# Altium PCB ip-mic.PcbDoc
Units mm, origin at the board's own origin, x right, y up, seen from the top; angles counter-clockwise.
Board outline 152.4 x 101.6 mm, 2 copper layers (Top Layer, Bottom Layer); 75 components, 61 nets, 288 pads, 100 vias.
Unrouted connection lines stored in the file: 46.
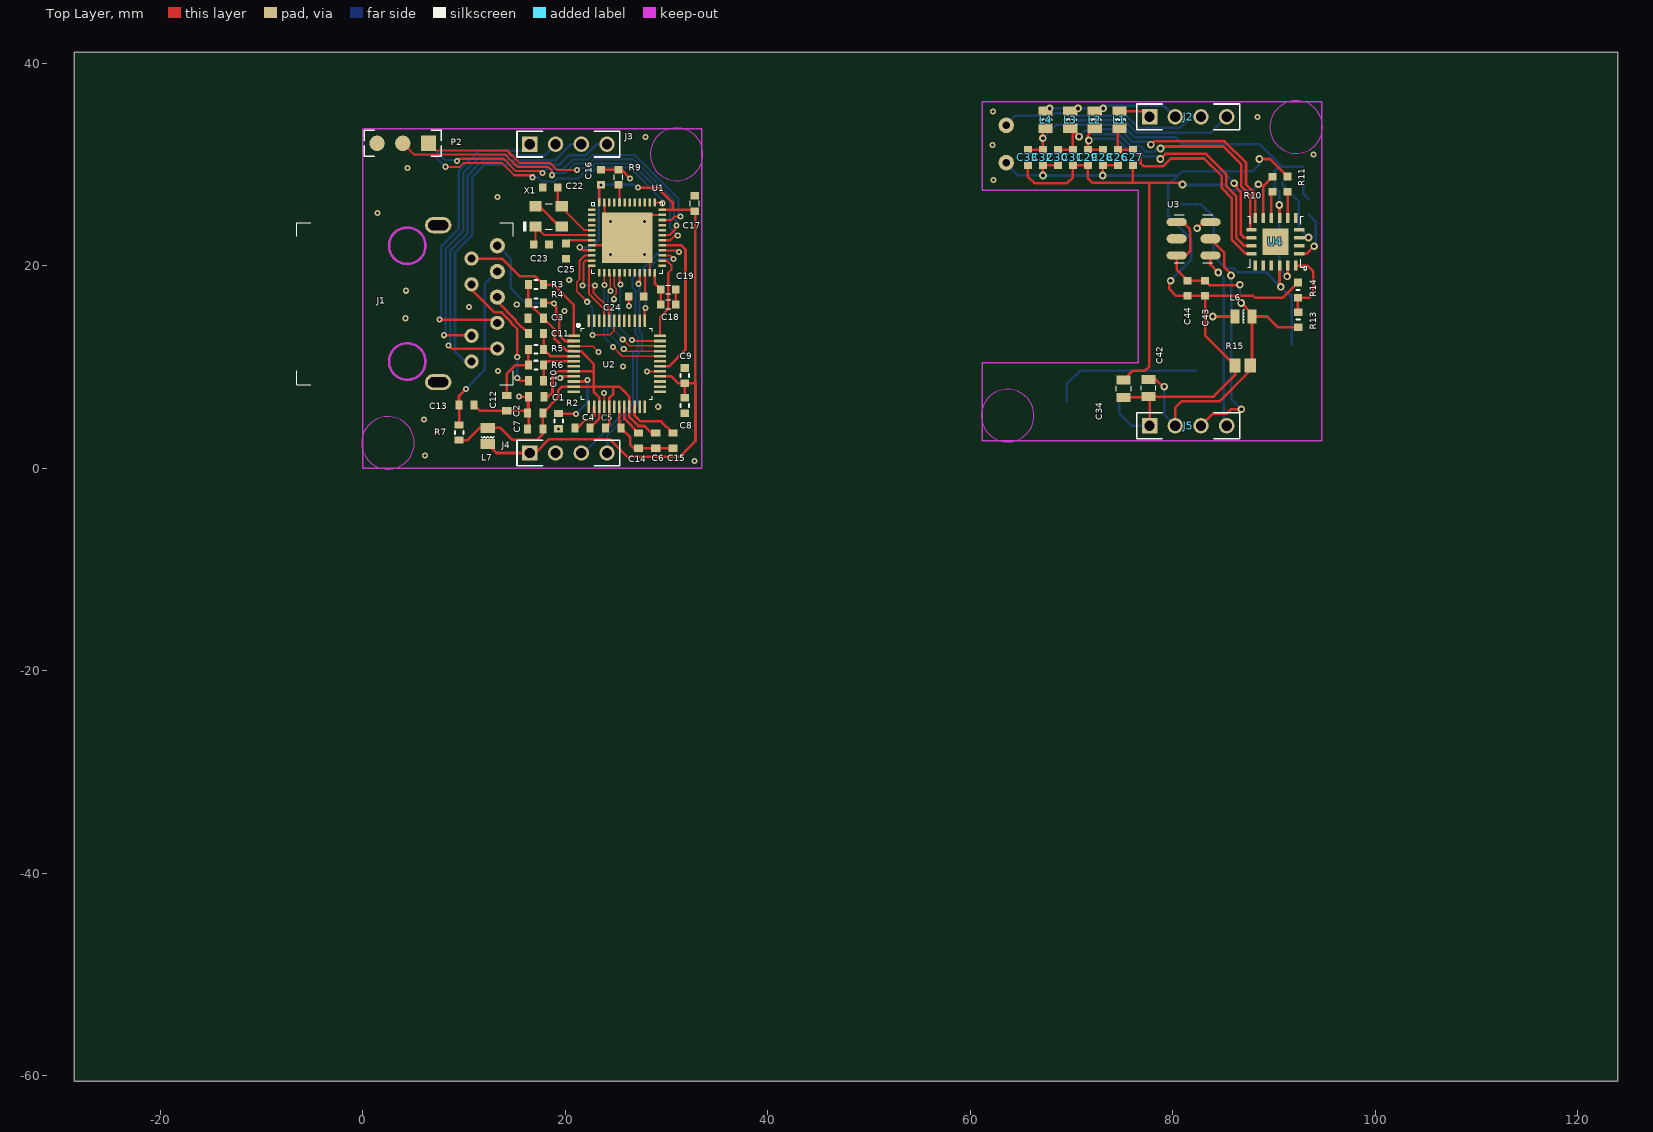
[diagram p0: Top Layer view]
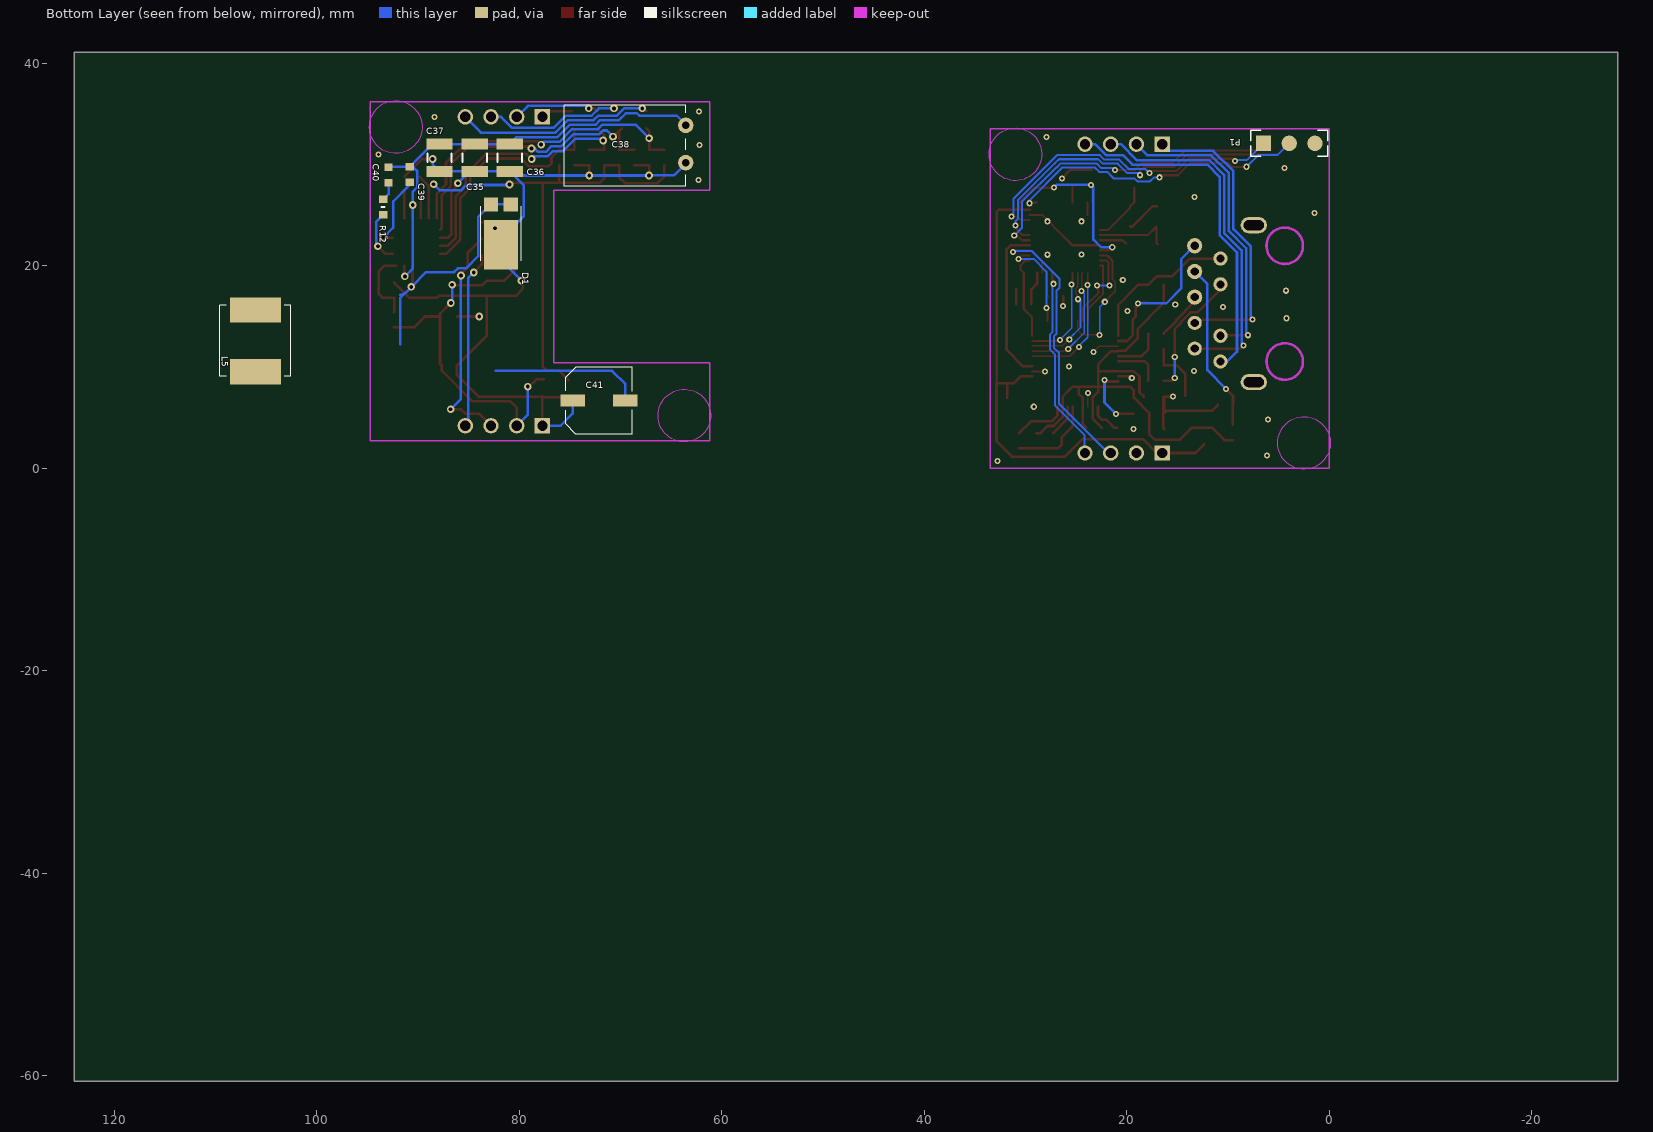
[diagram p1: Bottom Layer view, seen from below]

## Layer stack, top to bottom
Top Layer: signal copper 0.0356
Dielectric: dielectric 0.32, FR-4, Dk 4.8
Bottom Layer: signal copper 0.0356

## Board outline
-28.473,-60.531 123.927,-60.531 123.927,41.069 -28.473,41.069

## Design rules (kind name [scope] priority, off if disabled: settings)
Clearance [All] p1: gap=0.203
MinimumSolderMaskSliver [All] p1 off: minsoldermaskwidth=0.1
PolygonConnect [All] p1: connectstyle=Relief reliefconductorwidth=0.254 reliefentries=4 polygonreliefangle="90 Angle"
RoutingVias [All] p1: holewidth=0.3 width=0.6 viastyle="Through Hole" minholewidth=0.3 minwidth=0.6 maxholewidth=0.3 maxwidth=0.6
SilkscreenOverComponentPads [All] p1: minsilkscreentomaskgap=0.05
SolderMaskExpansion [All] p1: expansion=0.102
Width [All] p1: maxlimit=0.254 minlimit=0.152 preferedwidth=0.203
26 further rules are at their usual default settings.

## Components (designator, comment, footprint, x,y, rotation, side; value= is the part's Value field where it differs from the comment)
C1 "" 0603_C 17.145,7.061 r90 top
C2 "" 0603_C 17.043,5.461 r90 top
C3 "" 0603_C 17.094,14.808 r90 top
C4 "" 0603_C 21.717,3.988 r90 top
C5 "" 0603_C 24.74,3.988 r270 top
C6 "" 0603_C 28.943,2.718 r180 top
C7 "" 0603_C 17.043,3.861 r90 top
C8 "" C0603 31.801,6.198 r180 top
C9 "" C0603 31.801,9.144 r0 top
C10 "" 0603_C 17.12,8.636 r90 top
C11 "" 0603_C 17.12,13.284 r90 top
C12 "" 0603_C 14.224,6.426 r0 top
C13 "" 0603_C 10.262,6.248 r270 top
C14 "" 0603_C 27.254,2.718 r0 top
C15 "" 0603_C 30.632,2.718 r0 top
C16 "" C0603 23.52,28.727 r0 top
C17 "" C0603 32.791,26.137 r0 top
C18 "" C0603 30.175,16.18 r270 top
C19 "" C0603 30.175,17.653 r270 top
C22 "" C0603 18.517,27.737 r90 top
C23 "" C0603 17.653,22.073 r270 top
C24 "" C0603 27.026,16.967 r90 top
C25 "" C0603 20.091,21.438 r180 top
C26 "" C0603 74.567,30.683 r0 top
C27 "" C0603 76.048,30.683 r180 top
C28 "" C0603 73.087,30.683 r0 top
C29 "" C0603 71.606,30.683 r180 top
C30 "" C0603 68.645,30.683 r0 top
C31 "" C0603 70.126,30.683 r180 top
C32 "" C0603 67.165,30.683 r0 top
C33 "" C0603 65.684,30.683 r180 top
C34 "" C0805#1 75.133,7.849 r0 top
C35 "" C1210 84.379,30.655 r270 bottom
C36 "" C1210 80.924,30.655 r270 bottom
C37 "" C1210 87.859,30.655 r270 bottom
C38 "" CAP1 63.551,27.864 r0 bottom
C39 "" C0603 90.805,29.004 r0 bottom
C40 "" C0603 92.888,28.953 r0 bottom
C41 "" CAP2 72.111,6.678 r90 bottom
C42 "" C0805#1 77.597,7.925 r0 top
C43 "" C0603 83.185,17.777 r0 top
C44 "" C0603 81.458,17.777 r0 top
D1 "PDS5100" PDS5100 81.813,22.07 r0 bottom
J1 "HR891156C" HR891156C 6.4,16.25 r90 top locked
J2 "" CON4 85.319,34.692 r0 top
J3 "" CON4 24.13,32 r0 top locked
J4 "" CON4 24.13,1.5 r0 top locked
J5 "" CON4 85.319,4.192 r0 top
L1 "" L0805#1 74.727,34.414 r0 top
L2 "" L0805#1 72.297,34.414 r0 top
L3 "" L0805#1 69.867,34.414 r0 top
L4 "" L0805#1 67.437,34.414 r0 top
L5 "" IND7x7 102.54,16.078 r270 bottom
L6 "FB1" L0805#1 86.97,14.983 r90 top
L7 "HH-1M1608-121JT" L0805#2 12.344,3.175 r180 top
P1 "" CON3-SMT 6.502,32.08 r180 bottom
P2 "" CON3-SMT 6.502,32.08 r180 top
R2 "" 0603_R 19.355,4.648 r180 top
R3 "" 0603_R 17.12,18.136 r270 top
R4 "" 0603_R 17.12,16.332 r270 top
R5 "" 0603_R 17.12,11.735 r90 top
R6 "" 0603_R 17.12,10.185 r90 top
R7 "" 0603_R 9.525,3.531 r0 top
R9 "" C0603 25.273,28.727 r0 top
R10 "" R0603 89.84,27.28 r180 top
R11 "" R0603 91.313,27.305 r180 top
R12 "" R0603 93.421,25.042 r0 bottom
R13 "" R0603 92.38,15.418 r0 top
R14 "" R0603 92.354,18.339 r0 top
R15 "" C0805#2 86.893,10.157 r0 top
U1 "STM32F401CxU" UFQFPN48-7X7 26.111,22.758 r0 top
U2 "W5500" LQFP48-7x7 25.095,10.312 r0 top locked
U3 "MP45DT02-M" MP45DT02-M-1 80.162,25.016 r0 top
U4 "SI3402B" SI3402B 92.634,19.86 r180 top
X1 "25M" XTAL3225 18.364,24.867 r0 top

## Footprints (in the part's own frame and the unit in brackets; to place one, negate y for a bottom-side part, rotate by r counter-clockwise, add the part's x,y. Pads: shape width x height; smd on the part's side, far side on the other; paste and mask are expansions set on the pad)
0603_C [mm] "Microbit"
  rect 0.9x0.7 smd: 1(0,0.75) 2(0,-0.75)
  body extent -0.42,-0.75 0.43,0.8, height 0.45
0603_R [mm] "Microbit"
  rect 0.9x0.7 smd: 1(0,0.75) 2(0,-0.75)
  silkscreen extent -0.43,-0.15 0.43,0.15, body extent -0.42,-0.75 0.43,0.8, height 0.45
C0603 [mm] "0.8(无超出)  2."
  rect 0.8x0.75 smd: 1(0,0.75) 2(0,-0.75)
  silkscreen extent -0.43,-0.15 0.43,0.15
C0805#1 [mm] "2.0x1.2   两"
  rect 1.4x0.9 smd: 1(0,0.85) 2(0,-0.85)
  silkscreen extent -0.74,-0.23 0.74,0.23
C0805#2 [mm] "Chip Capacitor, Body 2.0x1.3mm, IPC High Density"
  rect 1.1x1.4 smd: 1(-0.75,0) 2(0.75,0)
  body extent -1.1,-0.72 1.1,0.72, height 1.4
C1210 [mm] "Chip Capacitor, Body 3.2x2.5mm, IPC High Density"
  rect 1.1x2.6 smd: 1(-1.35,0) 2(1.35,0)
  silkscreen extent -0.4,-1.2 0.4,1.2, body extent -1.7,-1.35 1.7,1.35, height 1.3
CAP1 [mil] "电"
  round 60 hole 30: 1(0,-91) 2(0,-236)
  silkscreen extent 0,-315 472,0
CAP2 [mm] "表"
  rect 1.2x2.4 smd: 1(0,2.6) 2(0,-2.6)
  silkscreen extent -3.3,-3.3 3.3,3.3
CON3-SMT [mil]
  rect 60x60 smd: 1(0,0)
  round 60 smd: 2(100,0) 3(200,0)
  silkscreen extent -50,-50 250,50
CON4 [mil] "2.54mm"
  rect 60x60 hole 40: 1(-300,0)
  round 60 hole 40: 2(-200,0) 3(-100,0) 4(0,0)
  silkscreen extent -350,-50 50,50
HR891156C [mm] "with POE 资"
  round 1.5 hole 0.8: 1(5.72,-6.895) 3(3.18,-6.895) 5(0.64,-6.895)
  round 1.4 hole 0.8: 2(4.45,-4.355) 4(1.91,-4.355) 7(-1.9,-6.895) 8(-3.17,-4.355) 9(-4.44,-6.895) 10(-5.71,-4.355)
  oval 1.6x2.6 hole 1 slot 2 at 90 deg: 11(-7.745,-1.057) 12(7.745,-1.057)
  Keep-Out Layer circle w0.254: c-5.715,1.995 r1.8
  Keep-Out Layer circle w0.254: c5.715,1.995 r1.8
  silkscreen extent -8,-8.48 8,12.92
IND7x7 [mm]
  rect 2.5x5 smd: 1(0.45,-3.5) 2(6.55,-3.5)
  silkscreen extent 0,-7 7,0
L0805#1 [mm] "2.0x1.2   两"
  rect 1.4x0.9 smd: 1(0,0.85) 2(0,-0.85)
  silkscreen extent -0.64,-0.08 0.64,0.08
L0805#2 [mm] "2.0x1.2   两"
  rect 1.4x1 smd: 1(0,0.8) 2(0,-0.8)
  silkscreen extent -0.64,0 0.64,0.16
LQFP48-7x7 [mm] "从mcu"
  rect 1.2x0.25 smd: 1(-4.25,2.75) 2(-4.25,2.25) 3(-4.25,1.75) 4(-4.25,1.25) 5(-4.25,0.75) 6(-4.25,0.25) 7(-4.25,-0.25) 8(-4.25,-0.75) 9(-4.25,-1.25) 10(-4.25,-1.75) 11(-4.25,-2.25) 12(-4.25,-2.75) 25(4.25,-2.75) 26(4.25,-2.25) 27(4.25,-1.75) 28(4.25,-1.25) 29(4.25,-0.75) 30(4.25,-0.25) 31(4.25,0.25) 32(4.25,0.75) 33(4.25,1.25) 34(4.25,1.75) 35(4.25,2.25) 36(4.25,2.75)
  rect 0.25x1.2 smd: 13(-2.75,-4.25) 14(-2.25,-4.25) 15(-1.75,-4.25) 16(-1.25,-4.25) 17(-0.75,-4.25) 18(-0.25,-4.25) 19(0.25,-4.25) 20(0.75,-4.25) 21(1.25,-4.25) 22(1.75,-4.25) 23(2.25,-4.25) 24(2.75,-4.25) 37(2.75,4.25) 38(2.25,4.25) 39(1.75,4.25) 40(1.25,4.25) 41(0.75,4.25) 42(0.25,4.25) 43(-0.25,4.25) 44(-0.75,4.25) 45(-1.25,4.25) 46(-1.75,4.25) 47(-2.25,4.25) 48(-2.75,4.25)
  silkscreen extent -3.92,-3.5 3.5,3.92
MP45DT02-M-1 [mm] "用"
  oval 2x0.8 smd: 1(0.212,-0.71) 3(0.212,-4.01) 4(3.549,-4.01) 6(3.548,-0.71)
  oval 2x0.9 smd: 2(0.212,-2.36) 5(3.549,-2.36)
  silkscreen extent 0,-4.72 3.76,0
PDS5100 [mm] "diodes.com  Schottky"
  rect 1.39x1.4 smd: 1(-0.985,-3.982) 1(0.985,-3.982)
  rect 3.36x4.86 smd: 2(0,0)
  silkscreen extent -2,-3.8 2,1.57
R0603 [mm] "Microbit"
  rect 0.8x0.75 smd: 1(0,0) 2(0,-1.5)
SI3402B [mm]
  rect 2.6x2.6 smd: 0(2.5,-2.5)
  rect 1x0.35 smd: 1(0.15,-1.3) 2(0.15,-2.1) 3(0.15,-2.9) 4(0.15,-3.7) 11(4.85,-3.7) 12(4.85,-2.9) 13(4.85,-2.1) 14(4.85,-1.3)
  rect 0.35x1 smd: 5(0.5,-4.85) 6(1.3,-4.85) 7(2.1,-4.85) 8(2.9,-4.85) 9(3.7,-4.85) 10(4.5,-4.85) 15(4.5,-0.15) 16(3.7,-0.15) 17(2.9,-0.15) 18(2.1,-0.15) 19(1.3,-0.15) 20(0.5,-0.15)
  silkscreen extent -0.59,-5 5.25,0.29
UFQFPN48-7X7 [mm]
  rect 0.75x0.25 smd: 1(-3.475,2.75) 2(-3.475,2.25) 3(-3.475,1.75) 4(-3.475,1.25) 5(-3.475,0.75) 6(-3.475,0.25) 7(-3.475,-0.25) 8(-3.475,-0.75) 9(-3.475,-1.25) 10(-3.475,-1.75) 11(-3.475,-2.25) 12(-3.475,-2.75) 25(3.475,-2.75) 26(3.475,-2.25) 27(3.475,-1.75) 28(3.475,-1.25) 29(3.475,-0.75) 30(3.475,-0.25) 31(3.475,0.25) 32(3.475,0.75) 33(3.475,1.25) 34(3.475,1.75) 35(3.475,2.25) 36(3.475,2.75)
  rect 0.25x0.75 smd: 13(-2.75,-3.475) 14(-2.25,-3.475) 15(-1.75,-3.475) 16(-1.25,-3.475) 17(-0.75,-3.475) 18(-0.25,-3.475) 19(0.25,-3.475) 20(0.75,-3.475) 21(1.25,-3.475) 22(1.75,-3.475) 23(2.25,-3.475) 24(2.75,-3.475) 37(2.75,3.475) 38(2.25,3.475) 39(1.75,3.475) 40(1.25,3.475) 41(0.75,3.475) 42(0.25,3.475) 43(-0.25,3.475) 44(-0.75,3.475) 45(-1.25,3.475) 46(-1.75,3.475) 47(-2.25,3.475) 48(-2.75,3.475)
  rect 5x5 smd paste-2.832: 49(0,0)
  silkscreen extent -3.5,-3.5 3.5,3.5
XTAL3225 [mm] "焊"
  rect 1.2x1 smd: 1(-1.3,-1) 2(1.3,-1) 3(1.3,1) 4(-1.3,1)
  silkscreen extent -2.49,-1.48 0.35,1.25

## Part data
C1 C2 C3 C4 C5 C6 C7 C8 C9 C10 C11 C12 C13 C14 C15 C16 C17 C18 C19 C26 C27 C28 C29 C30 C31 C32 C33 C34 C35 C36 C37 C39 C40 C42 C43 C44: library part Cap
C22 C23 C24 C25: library part Cap, "Capacitor"
C38 C41: library part Cap2, "Capacitor"
D1: library part "D Schottky", "Schottky Diode"
J1: "with POE"
J2 J3 J4 J5: library part CON4
L1 L2 L3 L4 L5 L6: library part Ind, "Inductor"
L7: library part Ind
P1 P2: library part "Header 3", "Header, 3-Pin"
R2 R3 R4 R5 R6 R7 R10 R11 R12 R13 R14 R15: library part Res
R9: library part Res3, "Resistor"
U1: "CBU CCU CDU CEU 还适用 F412C F413C"
U3: "digital microphone"
U4: "PoE with DC-DC"
X1: library part XTAL_4pin

## Via types
v1: diameter 0.6, hole 0.3, Top Layer to Bottom Layer, 71 vias
v2: diameter 0.762, hole 0.381, Top Layer to Bottom Layer, 29 vias

## Nets (pads, with @x,y where several pads share a name; then routed paths per layer and width w, separated by ;. In a path a pad name is that pad's centre, name@x,y a point inside that pad or via, vN(x,y) a via of type N, cw(c..) or ccw(c..) an arc to the next point about the centre after c; other vN are vias at no path point)
3V3: C8.2 C9.2 C16.2 C17.2 C18.2 C19.2 J4.1 L7.1 U1.9 U1.24 U1.36 U1.48 U2.28 | length 76.5
  Top Layer w0.254: L7.1 13.219,1.5 J4.1 17.045,1.5 18.415,2.87 24.384,2.87 26.111,1.143 31.344,1.143 32.868,2.667 32.868,8.407 32.854,8.394 ; v1(21.438,21.819) 21.748,21.508 U1.9 ; U1.48 23.361,27.818 v1(23.52,27.977) ; v1(27.203,27.711) 29.134,27.711 30.607,26.238 30.607,25.508 ; U1.24 28.861,18.217 C19.2 C18.2 ; U2.28 30.485,9.062 31.154,8.394 C9.2 ; U1.36 30.607,25.508 ; C8.2 C9.2 ; C17.2@32.632,25.508 30.607,25.508 ; C17.2 32.854,25.324 32.854,8.394 ; C9.2 32.854,8.394
  Bottom Layer w0.254: v1(21.438,21.819) 22.53,21.819 23.292,22.581 23.292,27.749 v1(23.52,27.977) 26.937,27.977 v1(27.203,27.711)
3V3A: C1.2 C2.2 C3.2 C4.2 C5.2 C6.2 C7.2 L7.2 R3.2 R4.2 R7.2 U2.4 U2.8 U2.11 U2.15 U2.17 U2.21 | length 56.4
  Top Layer w0.254: R7.2 10.35,2.781 11.544,3.975 L7.2 13.602,3.975 14.757,2.819 17.247,2.819 17.793,3.366 C7.2 C2.2 19.304,6.972 19.304,7.696 19.67,8.062 U2.11 22.835,8.062 ; R3.2 R4.2 17.844,14.858 C3.2 18.93,13.722 18.93,12.786 20.109,11.607 20.8,11.607 U2.4 21.537,11.562 22.835,10.265 22.835,9.576 ; 18.313,7.061 18.745,7.493 18.745,9.044 19.263,9.562 U2.8 22.821,9.562 22.835,9.576 ; C4.2 23.345,4.866 U2.15 23.345,7.008 22.835,7.518 22.835,8.062 ; C5.2 24.345,4.343 U2.17 24.345,6.921 24.765,7.341 24.765,8.062 ; C6.2 28.521,3.468 27.823,4.166 27.225,4.166 26.345,5.045 U2.21 26.345,7.056 25.7,7.701 25.698,7.701 25.337,8.062 24.765,8.062 ; 22.835,8.062 22.835,9.576 ; 22.835,8.062 24.765,8.062
25MHZ: U1.29 U2.30 | length 15.6
  Top Layer w0.254: U2.30 30.237,10.062 31.877,11.702 31.877,21.592 31.461,22.008 U1.29
CS: U1.14 U2.32 | length 12.7
  Top Layer w0.152: v1(23.861,18.074) U1.14 ; v1(24.714,11.989) 25.641,11.062 U2.32
  Bottom Layer w0.152: v1(23.861,18.074) 23.861,12.943 24.714,12.09 v1(24.714,11.989)
GND: C1.1 C2.1 C3.1 C4.1 C5.1 C6.1 C7.1 C8.1 C9.1 C12.2 C13.1 C14.2 C15.2 C16.1 C17.1 C18.1 C19.1 C22.1 C23.1 C24.1 C25.1 J4.2 P1.3 P2.3 R2.1 R9.1 U1.8 U1.23 U1.35 U1.47 U1.49 U2.3 U2.9 U2.14 U2.16 U2.19 U2.29 U2.48 X1.2 X1.4 | length 50.2
  Top Layer w0.152: U2.3 22.71,12.062 v1(23.292,11.481) ; U2.16 v1(23.845,7.411) ; U1.23 U1.49@28.361,20.508
  Top Layer w0.203: U1.49@23.861,25.008 U1.47 ; U1.49 28.361,25.008 U1.35 ; v1(28.079,9.562) U2.29
  Top Layer w0.254: C13.1 11.584,5.676 C12.2 16.078,5.676 C2.1 16.293,6.96 C1.1 ; v1(15.418,7.061) C1.1 ; C7.1 16.395,3.962 C1.1 ; X1.4 17.44,25.867 19.44,23.867 X1.2 ; J4.2 J4.2@19.355,1.805 ; v1(19.507,8.915) 19.654,9.062 U2.9 ; C4.1 21.2,3.988 21.98,4.768 22.446,4.768 22.845,5.167 U2.14 ; U1.8 25.361,22.008 U1.49 ; C16.1 R9.1 25.564,29.477 v1(26.416,28.626) ; U2.19 25.345,4.132 C5.1 26.416,3.061 26.416,2.349 26.797,1.968 C14.2 C6.1 C15.2 ; C24.1 26.276,16.066 v1(26.314,16.027) ; C18.1 C19.1
  Bottom Layer w0.254: v1(19.507,8.915) v1@19.507,9.017
  other v1: 32.766,0.711 6.147,1.245 19.355,3.861 6.045,4.801 29.185,6.071 25.705,10.058 4.242,14.808 19.939,15.545 15.215,16.18 4.293,17.526 20.396,18.593 27.813,21.082 24.46,21.107 24.486,24.384 27.838,24.384 1.473,25.197 13.31,26.772 4.42,29.642 27.94,32.715
I2S2_CK: J4.4 U1.21 | length 19.4
  Top Layer w0.203: v1(27.254,18.212) 27.361,18.319 U1.21
  Bottom Layer w0.203: J4.4 24.155,1.525 24.155,3.261 27.101,6.207 27.101,11.241 27.605,11.744 27.605,13.198 27.33,13.473 27.33,18.136 v1(27.254,18.212)
I2S2_SD: J4.3 U1.28 | length 27.4
  Top Layer w0.203: U1.28 31.07,21.508 v1(31.217,21.361)
  Bottom Layer w0.203: J4.3 21.82,1.5 26.695,6.375 26.695,11.409 27.198,11.913 27.198,13.03 26.924,13.305 26.924,17.551 26.65,17.826 26.65,18.699 29.413,21.463 31.217,21.463 v1(31.217,21.361)
INT: U1.26 U2.36 | length 8.5
  Top Layer w0.203: U2.36 29.345,14.894 30.175,15.724 30.175,19.279 30.48,19.583 30.48,20.045 30.017,20.508 U1.26
MISO: U1.16 U2.34 | length 11.4
  Top Layer w0.152: v1(24.816,16.688) 24.816,17.018 25.039,17.242 25.039,17.741 24.861,17.919 U1.16 ; v1(25.679,12.725) 25.73,12.725 26.015,12.441 26.015,12.435 26.354,12.095 29.312,12.095 U2.34
  Bottom Layer w0.152: v1(24.816,16.688) 24.714,16.789 24.572,16.647 24.572,13.884 25.679,12.776 v1(25.679,12.725)
MOSI: U1.17 U2.35 | length 10
  Top Layer w0.152: U1.17 25.361,18.251 v1(25.451,18.161) ; v1(26.594,12.675) 26.706,12.562 U2.35
  Bottom Layer w0.152: v1(25.451,18.161) 25.425,18.161 25.425,13.843 v1(26.594,12.675)
NetC10_1: C10.1 J1.4 | length 12.7
  Top Layer w0.254: J1.4 10.755,17.642 13.017,15.38 13.722,15.38 14.656,14.446 14.656,14.352 15.265,13.742 v1(15.265,10.998) ; v1(15.265,8.915) 15.545,8.636 C10.1
  Bottom Layer w0.254: v1(15.265,8.915) v1(15.265,10.998)
NetC11_1: C11.1 J1.5 | length 4.9
  Top Layer w0.254: J1.5 13.295,16.453 15.113,14.635 15.113,14.541 C11.1
NetC12_1: C12.1 R5.1 R6.1 | length 6.2
  Top Layer w0.254: C12.1 14.224,9.296 15.113,10.185 R6.1 R5.1
NetC13_2: C13.2 J1.3 R7.1 | length 16.7
  Top Layer w0.254: R7.1 9.525,6.235 C13.2 9.512,7.149 v1(10.185,7.823)
  Bottom Layer w0.254: v1(10.185,7.823) 12.04,9.677 12.04,18.175 J1.3
NetC14_1: C14.1 U2.20 | length 3.2
  Top Layer w0.254: U2.20 25.845,4.899 27.254,3.49 C14.1
NetC15_1: C15.1 U2.22 | length 5.4
  Top Layer w0.254: U2.22 26.845,5.21 27.432,4.623 29.477,4.623 C15.1
NetC22_2: C22.2 U1.5 X1.3 | length 6.1
  Top Layer w0.203: C22.2 19.267,26.264 X1.3 19.664,25.726 21.881,23.508 U1.5
NetC23_2: C23.2 U1.6 X1.1 | length 7.8
  Top Layer w0.203: C23.2 17.064,22.234 X1.1 17.922,23.008 U1.6
NetC24_2: C24.2 U1.22 | length 2.4
  Top Layer w0.203: C24.2 27.861,17.053 U1.22
NetC25_2: C25.2 U1.7 | length 2.7
  Top Layer w0.203: C25.2 20.412,22.508 U1.7
NetC26_1: C26.1 C27.2 L1.2 U4.14 | length 23.7
  Top Layer w0.254: L1.2 74.567,33.405 C26.1 C27.2 76.81,30.671 76.81,30.099 77.089,29.82 79.06,29.82 79.822,30.582 83.083,30.582 84.836,28.829 84.836,27.649 85.802,26.684 85.802,22.594 87.236,21.16 U4.14
NetC26_2: C26.2 C28.2 C30.2 C32.2 C34.2 C35.2 C36.2 C37.2 C38.1 C41.1 C42.2 C43.2 C44.2 D1.2 J5.1 R11.2 R14.1 R15.1 U3.6 U4.12 | length 100.6
  Top Layer w0.254: v2(67.183,28.905) 67.165,28.923 C32.2 C30.2 ; v2(73.076,28.905) 73.087,28.916 C28.2 C26.2 ; C34.2 77.521,6.999 C42.2 84.011,7.075 86.143,9.207 R15.1 83.185,13.116 C43.2 ; J5.1 C42.2@77.699,6.973 ; v2(79.781,18.517) 79.629,18.364 79.629,17.729 80.331,17.027 C44.2 C43.2 ; v2(82.398,23.698) 83.006,24.306 U3.6 ; v2(86.055,28.143) 86.182,28.143 86.309,28.016 86.309,27.649 86.716,27.243 86.716,23.061 87.016,22.76 U4.12 ; v2(88.544,30.531) 89.587,30.531 R11.2 ; R14.1 90.83,16.815 88.138,16.815 87.925,17.027 C43.2
  Bottom Layer w0.254: C38.1@63.449,30.147 64.666,28.931 v2@67.183,28.931 ; v2(67.183,28.905) v2(73.076,28.905) C36.2@80.524,28.905 ; C41.1 74.711,5.401 75.919,4.192 J5.1 ; v2(79.781,18.517) 81.813,20.549 D1.2 81.813,22.631 79.527,24.917 79.527,27.908 C36.2@80.524,28.905 ; v2(86.055,28.143) C35.2@84.893,29.305 ; v2(88.544,30.531) 88.544,29.991 C37.2 C35.2@84.893,29.305 ; C36.2@80.524,28.905 C36.2 C35.2 C35.2@84.893,29.305
NetC27_1: C27.1 C29.1 C31.1 C33.1 C34.1 R10.2 U4.9 | length 55.7
  Top Layer w0.254: C33.1 65.684,28.778 66.319,28.143 69.571,28.143 70.126,28.698 C31.1 C29.1 71.606,28.622 72.06,28.169 76.022,28.169 ; C34.1 76.061,9.627 77.241,9.627 77.673,10.058 77.673,28.143 ; C27.1 76.048,28.194 76.022,28.169 ; v2(80.95,28.016) 80.797,28.169 76.022,28.169 ; v2(88.443,28.042) 88.611,27.874 88.934,27.874 ; U4.9 88.934,27.874 ; R10.2 88.934,27.874
  Bottom Layer w0.254: v2(80.95,28.016) 81.001,27.965 85.227,27.965 85.761,27.432 87.833,27.432 v2(88.443,28.042)
NetC28_1: C28.1 C29.2 L2.2 U4.13 | length 28.1
  Top Layer w0.254: v2(71.704,32.358) 71.703,32.36 v2@71.577,32.36 ; L2.2 71.577,32.845 v2@71.577,32.36 ; C28.1 C29.2 71.577,31.462 v2@71.577,32.36 ; v2(78.765,30.531) 79.273,31.039 83.272,31.039 85.293,29.018 85.293,27.838 86.259,26.873 86.259,22.784 87.082,21.96 U4.13
  Bottom Layer w0.254: v2(71.704,32.358) 71.882,32.536 74.44,32.536 75.66,31.315 76.649,31.315 77.179,30.785 78.511,30.785 v2(78.765,30.531)
NetC30_1: C30.1 C31.2 L3.2 U4.11 | length 29.5
  Top Layer w0.254: C30.1 C31.2 L3.2@70.126,33.306 ; L3.2 L3.2@70.126,33.306 ; v2(70.739,32.741) 70.691,32.741 L3.2@70.126,33.306 ; v2(78.791,31.572) 78.988,31.77 84.983,31.77 86.766,29.986 86.766,27.838 87.629,26.976 87.629,23.715 U4.11
  Bottom Layer w0.254: v2(70.739,32.741) 71.349,33.35 71.718,33.35 72.075,32.993 74.629,32.993 75.849,31.772 76.838,31.772 77.368,31.242 78.12,31.242 78.45,31.572 v2(78.791,31.572)
NetC32_1: C32.1 C33.2 L4.2 U4.10 | length 32
  Top Layer w0.254: C33.2 C32.1 v2(67.165,32.588) 67.165,33.292 L4.2 ; v2(77.826,31.953) 78.156,32.283 85.115,32.283 87.223,30.175 87.223,28.028 88.134,27.117 U4.10
  Bottom Layer w0.254: v2(67.165,32.588) 68.484,33.907 71.807,33.907 72.264,33.45 74.818,33.45 76.039,32.229 77.549,32.229 v2(77.826,31.953)
NetC35_1: C35.1 C36.1 C37.1 C38.2 C39.2 C40.2 U4.7 U4.19 | length 46.3
  Top Layer w0.254: v2(90.5,25.984) 90.534,25.951 U4.7 ; v2(91.288,18.948) 91.334,18.995 U4.19
  Bottom Layer w0.254: C38.2@63.449,33.83 64.44,34.821 68.138,34.821 68.369,35.052 69.466,35.052 70.154,34.364 71.997,34.364 72.454,33.907 75.007,33.907 76.228,32.686 80.243,32.686 C36.1 C35.1 C37.1 88.554,32.005 C39.2 ; v2(91.288,18.948) 90.5,19.736 v2(90.5,25.984) 90.5,27.317 90.075,27.743 90.075,29.366 90.463,29.754 C39.2 ; C40.2@92.837,29.754 C39.2
NetC39_1: C39.1 U4.3 | length 7.5
  Top Layer w0.254: U4.3 93.372,22.76 v2(93.396,22.784)
  Bottom Layer w0.254: C39.1 90.805,27.965 92.431,26.34 92.431,23.749 v2(93.396,22.784)
NetC40_1: C40.1 R12.2 | length 1.9
  Bottom Layer w0.254: C40.1 92.888,27.075 R12.2
NetC41_2: C41.2 L5.2 L6.1 | length 17.2
  Top Layer w0.254: v2(83.947,14.986) 83.95,14.983 L6.1
  Bottom Layer w0.254: C41.2 69.511,8.297 70.82,9.606 82.326,9.606
NetC42_1: C42.1 C43.1 C44.1 J5.2 L6.2 R13.2 R15.2 U3.1 U3.3 | length 44.5
  Top Layer w0.254: C42.1 78.296,8.775 79.019,8.052 v2(79.146,8.052) ; J5.2 80.239,5.983 80.86,6.604 84.607,6.604 87.643,9.64 R15.2 87.82,10.334 L6.2 ; U3.1 80.999,24.306 81.687,23.619 81.687,23.378 81.712,23.353 81.712,21.438 81.281,21.006 U3.3 80.374,19.611 C44.1 C43.1 83.653,18.059 v2@86.614,18.059 ; v2(86.741,16.307) 86.766,16.307 87.82,15.254 L6.2 ; R13.2 90.375,13.918 89.309,14.983 L6.2
  Bottom Layer w0.254: v2(79.146,8.052) 79.146,5.285 J5.2 ; v2(86.614,18.11) 86.614,16.434 v2(86.741,16.307)
  other v1: 62.281,28.448 93.904,30.963 62.205,31.902 88.341,34.696 62.23,35.23
NetD1_1: D1.1 L5.1 U4.18 | length 24
  Top Layer w0.254: U4.18 90.534,18.026 v2(90.653,17.907)
  Bottom Layer w0.254: D1.1@80.828,26.052 D1.1@82.508,26.052 ; D1.1@82.798,26.052 84.049,24.802 84.049,20.93 85.243,19.736 86.045,19.736 86.426,19.355 89.205,19.355 v2(90.653,17.907) 91.726,16.834 91.726,12.26 ; 91.215,17.345 ccw(c91.726,17.856) 91.726,17.133
NetJ1_7: J1.7 J3.1 | length 29.4
  Top Layer w0.254: v1(7.569,14.681) 12.964,14.681 J1.7
  Bottom Layer w0.254: v1(7.569,14.681) 7.748,14.86 7.748,21.881 9.469,23.602 9.469,29.331 11.481,31.343 15.853,31.343 J3.1
NetJ1_8: J1.8 J3.2 | length 29.9
  Top Layer w0.254: v1(8.026,13.132) 10.703,13.132 J1.8
  Bottom Layer w0.254: v1(8.026,13.132) 8.205,13.31 8.205,21.692 9.926,23.413 9.926,29.142 11.67,30.886 17.936,30.886 J3.2
NetJ1_9: J1.9 J3.3 | length 35
  Top Layer w0.254: v1(8.484,12.116) 8.789,11.81 J1.9
  Bottom Layer w0.254: v1(8.484,12.116) 8.662,12.294 8.662,21.503 10.383,23.224 10.383,28.953 11.859,30.429 19.024,30.429 20.594,32 J3.3
NetJ1_10: J1.10 J3.4 | length 34.6
  Bottom Layer w0.254: J1.10 10.085,10.54 9.119,11.506 9.119,21.313 10.84,23.034 10.84,28.763 12.048,29.972 19.457,29.972 20.392,30.908 22.042,30.908 23.134,32 J3.4
NetJ2_1: J2.1 L1.1 | length 3.1
  Top Layer w0.254: L1.1@74.828,35.264 77.127,35.264 J2.1
NetJ2_2: J2.2 L2.1 | length 8.8
  Top Layer w0.254: L2.1 72.59,35.557 73.152,35.557 v2(73.127,35.532)
  Bottom Layer w0.254: v2(73.127,35.532) 73.127,35.787 79.144,35.787 J2.2
NetJ2_3: J2.3 L3.1 | length 13.4
  Bottom Layer w0.254: v2(70.637,35.532) 72.121,35.532 72.832,34.821 73.421,34.821 73.424,34.823 75.384,34.823 76.607,33.6 80.691,33.6 81.783,34.692 J2.3
NetJ2_4: J2.4 L4.1 | length 19.8
  Top Layer w0.254: L4.1 67.806,35.634 67.843,35.634 v2(67.843,35.532)
  Bottom Layer w0.254: v2(67.843,35.532) 69.632,35.532 70.343,34.821 72.186,34.821 72.643,34.364 73.61,34.364 73.613,34.366 75.194,34.366 76.417,33.143 83.77,33.143 J2.4
NetJ5_3: J5.3 U3.5 | length 22.8
  Top Layer w0.254: J5.3 83.971,5.385 85.307,5.385 85.739,5.817 v2(86.766,5.817) ; U3.5 85.065,21.303 85.065,19.863 85.75,19.177 v2(85.75,19.025)
  Bottom Layer w0.254: v2(85.75,19.025) 85.75,6.833 v2(86.766,5.817)
NetJ5_4: J5.4 U3.4 | length 17.5
  Top Layer w0.254: U3.4 83.711,20.098 v2(84.48,19.329)
  Bottom Layer w0.254: v2(84.48,19.329) 85.039,18.771 85.039,4.472 J5.4
NetP2_1: P2.1 U1.30 | length 32.2
  Top Layer w0.203: P2.1 7.214,31.369 14.25,31.369 15.469,30.15 18.498,30.15 19.184,29.464 v1(21.158,29.464) ; U1.30 30.373,22.508 30.826,22.962 v1(31.115,22.962)
  Bottom Layer w0.203: v1(21.158,29.464) 21.158,29.642 21.18,29.664 22.558,29.664 22.993,30.099 26.527,30.099 26.934,29.693 26.96,29.693 30.358,26.294 30.358,23.718 v1(31.115,22.962)
NetP2_2: P2.2 U1.31 | length 35.3
  Top Layer w0.203: P2.2 5.08,30.963 14.081,30.963 15.3,29.744 18.33,29.744 18.694,29.379 v1(18.694,28.931) ; U1.31 30.298,23.008 30.861,23.571 30.861,23.825 v1(30.988,23.952)
  Bottom Layer w0.203: v1(18.694,28.931) 18.694,29.083 18.746,29.135 19.959,29.135 20.895,30.07 22.389,30.07 22.825,30.506 26.695,30.506 27.102,30.099 27.127,30.099 30.764,26.462 30.764,24.616 30.988,24.393 v1(30.988,23.952)
NetR2_2: R2.2 U2.10 | length 7
  Top Layer w0.254: R2.2 19.394,5.359 v1(21.057,5.359) ; U2.10 22.05,8.562 v1(22.2,8.712)
  Bottom Layer w0.254: v1(21.057,5.359) 22.2,6.502 v1(22.2,8.712)
NetR9_2: R9.2 U1.44 | length 1.8
  Top Layer w0.203: R9.2 25.361,27.889 U1.44
NetR10_1: R10.1 U4.8 | length 2.6
  Top Layer w0.254: U4.8 89.734,27.174 R10.1
NetR11_1: R11.1 U4.6 | length 2.6
  Top Layer w0.254: R11.1 91.334,27.284 U4.6
NetR12_1: R12.1 U4.1 | length 5.3
  Top Layer w0.254: U4.1 93.197,21.16 v2(93.955,21.918)
  Bottom Layer w0.254: R12.1 94.107,24.356 94.107,22.07 v2(93.955,21.918)
NetR13_1: R13.1 R14.2 U4.20 | length 7.3
  Top Layer w0.254: U4.20 93.299,20.01 93.853,19.456 93.853,17.196 93.496,16.839 R14.2 92.354,15.443 R13.1
PMOD0: U1.12 U2.45 | length 6.4
  Top Layer w0.203: U1.12 22.333,20.008 22.333,17.215 23.845,15.703 U2.45
PMOD1: U1.11 U2.44 | length 8.8
  Top Layer w0.203: v1(21.717,18.034) 21.819,18.136 21.819,20.32 22.007,20.508 U1.11 ; v1(22.962,18.034) 22.784,18.034 22.784,17.339 24.345,15.777 U2.44
  Bottom Layer w0.203: v1(21.717,18.034) v1(22.962,18.034)
PMOD2: U1.10 U2.43 | length 12.8
  Top Layer w0.152: 21.412,18.663 21.138,18.388 21.138,17.47 v1(22.174,16.434) ; v1(22.682,13.157) 24.409,13.157 24.845,13.593 U2.43
  Top Layer w0.203: 21.412,18.663 21.412,20.488 21.933,21.008 U1.10
  Bottom Layer w0.152: v1(22.174,16.434) 22.682,15.926 v1(22.682,13.157)
RD+: C10.2 R6.2 U2.6 | length 4.7
  Top Layer w0.254: C10.2 R6.2 18.247,10.562 U2.6
RD-: C11.2 R5.2 U2.5 | length 4.8
  Top Layer w0.254: C11.2 R5.2 18.542,11.062 U2.5
RST: U1.27 U2.37 | length 9.4
  Top Layer w0.203: U2.37 27.845,15.729 v1(27.94,15.824) ; U1.27 30.376,21.008 v1(30.709,20.676)
  Bottom Layer w0.203: v1(27.94,15.824) 27.94,19.415 29.2,20.676 v1(30.709,20.676)
SCK: U1.15 U2.33 | length 11.9
  Top Layer w0.152: U1.15 24.44,19.204 24.44,17.52 v1(24.46,17.501) ; v1(25.781,11.786) 26.004,11.562 U2.33
  Bottom Layer w0.152: v1(24.46,17.501) 24.217,17.257 24.217,13.35 v1(25.781,11.786)
SWCLK: P1.2 U1.37 | length 30.5
  Top Layer w0.203: v1(8.179,29.769) 8.199,29.748 9.572,29.748 9.974,30.15 13.745,30.15 14.964,28.931 16.586,28.931 v1(16.789,28.727) ; U1.37 29.545,26.233 v1(29.616,26.162)
  Bottom Layer w0.203: P1.2 5.131,30.912 7.036,30.912 v1(8.179,29.769) ; v1(16.789,28.727) 17.306,28.727 17.707,28.326 18.945,28.326 19.245,28.626 21.314,28.626 21.946,29.258 22.726,29.258 23.161,29.693 26.359,29.693 29.642,26.41 29.642,26.187 v1(29.616,26.162)
SWDIO: P1.1 U1.34 | length 32.3
  Top Layer w0.203: v1(9.322,30.353) 9.525,30.556 13.913,30.556 15.132,29.337 17.551,29.337 v1(17.755,29.134) ; U1.34 30.452,24.508 30.81,24.867 v1(31.369,24.867)
  Bottom Layer w0.203: P1.1 8.153,30.429 9.246,30.429 v1(9.322,30.353) ; v1(17.755,29.134) 18.162,29.541 19.791,29.541 20.726,30.476 22.221,30.476 22.656,30.912 26.89,30.912 31.171,26.631 31.171,25.065 v1(31.369,24.867)
TD+: J1.1 R4.1 U2.2 | length 15.5
  Top Layer w0.254: R4.1 v1@18.694,16.332 ; v1(18.898,16.281) 18.898,16.129 19.101,15.926 19.101,15.012 19.406,14.707 19.406,13.157 20,12.562 U2.2
  Bottom Layer w0.254: J1.1 14.63,20.635 14.63,17.755 16.104,16.281 v1(18.898,16.281)
TD-: J1.2 R3.1 U2.1 | length 15.1
  Top Layer w0.254: J1.2 13.768,20.7 15.494,18.974 17.031,18.974 R3.1 18.847,18.136 20.845,16.137 U2.1
pads on no net: J1.11 J1.12 U1.1 U1.2 U1.3 U1.4 U1.13 U1.18 U1.19 U1.20 U1.25 U1.32 U1.33 U1.38 U1.39 U1.40 U1.41 U1.42 U1.43 U1.45 U1.46 U2.7 U2.12 U2.13 U2.18 U2.23 U2.24 U2.25 U2.26 U2.27 U2.31 U2.38 U2.39 U2.40 U2.41 U2.42 U2.46 U2.47 U3.2 U4.0 U4.2 U4.4 U4.5 U4.15 U4.16 U4.17
copper on no net:
  other v1: 13.36,9.601 10.49,15.9

## Keep-outs
Keep-Out Layer:
  circle w0.1: c92.189,33.692 r2.6
  circle w0.1: c63.689,5.192 r2.6
  circle w0.1: c2.5,2.5 r2.6
  circle w0.1: c31,31 r2.6
  lines w0.15: 0,0 0,33.5 33.5,33.5 33.5,0 0,0 ; 61.189,2.692 61.189,10.437 76.589,10.437 76.589,27.455 61.189,27.455 61.189,36.192 94.689,36.192 94.689,2.692 61.189,2.692

## Silkscreen, mask and mechanical layers (free items; w line width, h text height)
Top Overlay: